# Altium PCB bwl1.1.PcbDoc
Units mil, origin at the board's own origin, x right, y up, seen from the top; angles counter-clockwise.
Board outline 1985.03 x 3944.03 mil, 2 copper layers (Top Layer, Bottom Layer); 111 components, 72 nets, 399 pads, 68 vias.
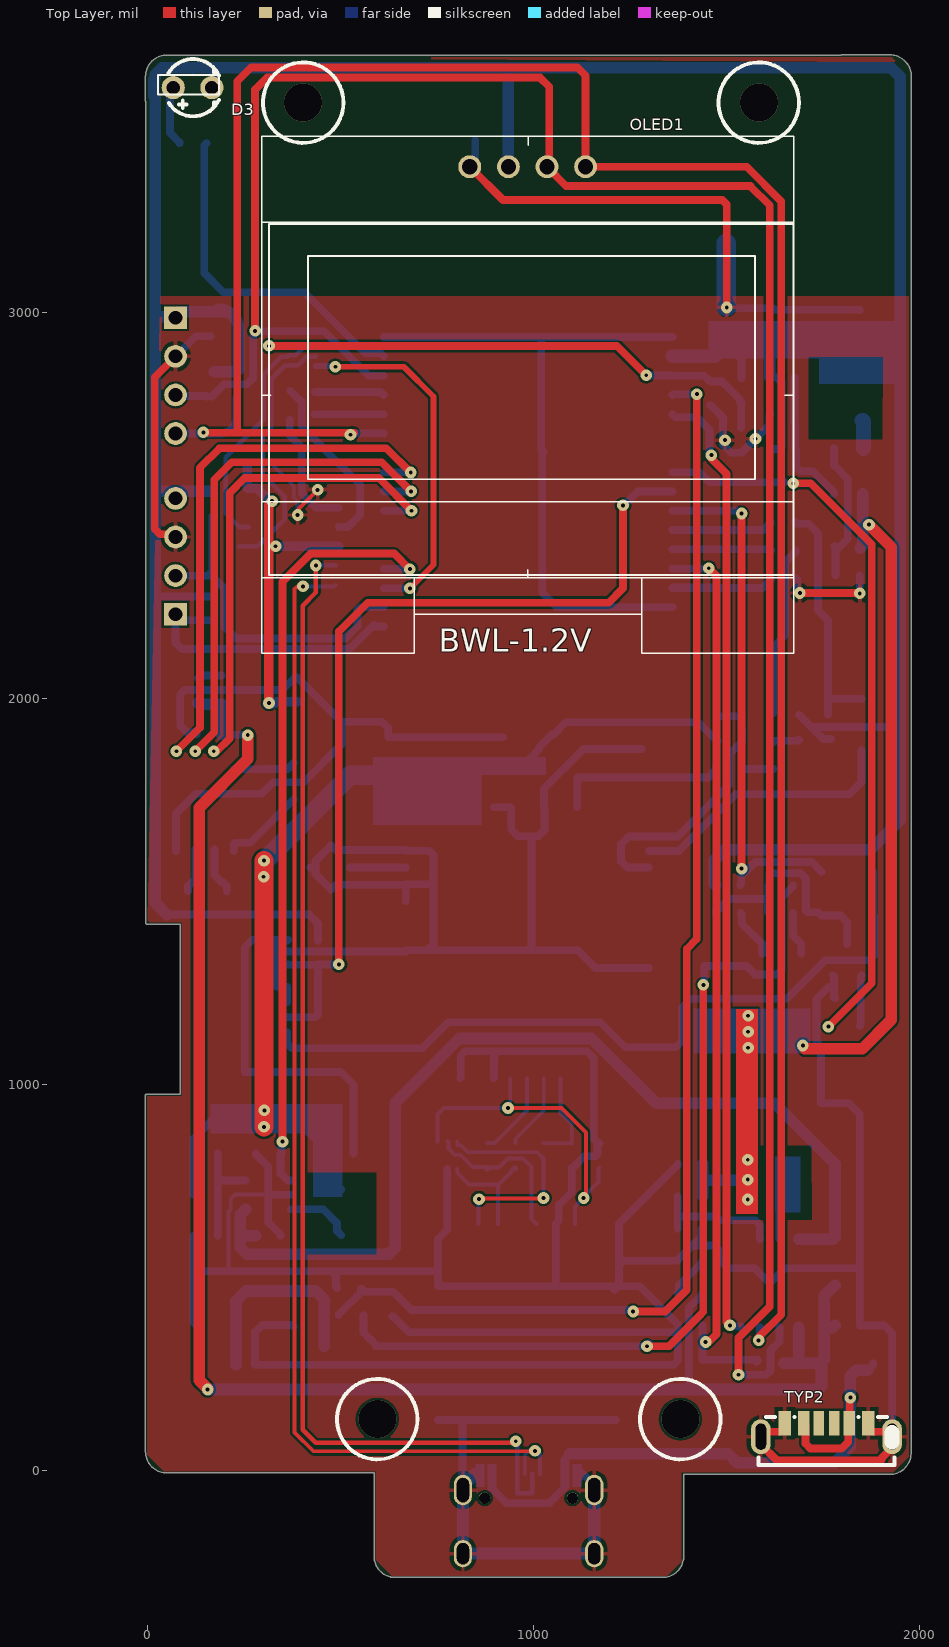
[diagram p0: Top Layer view]
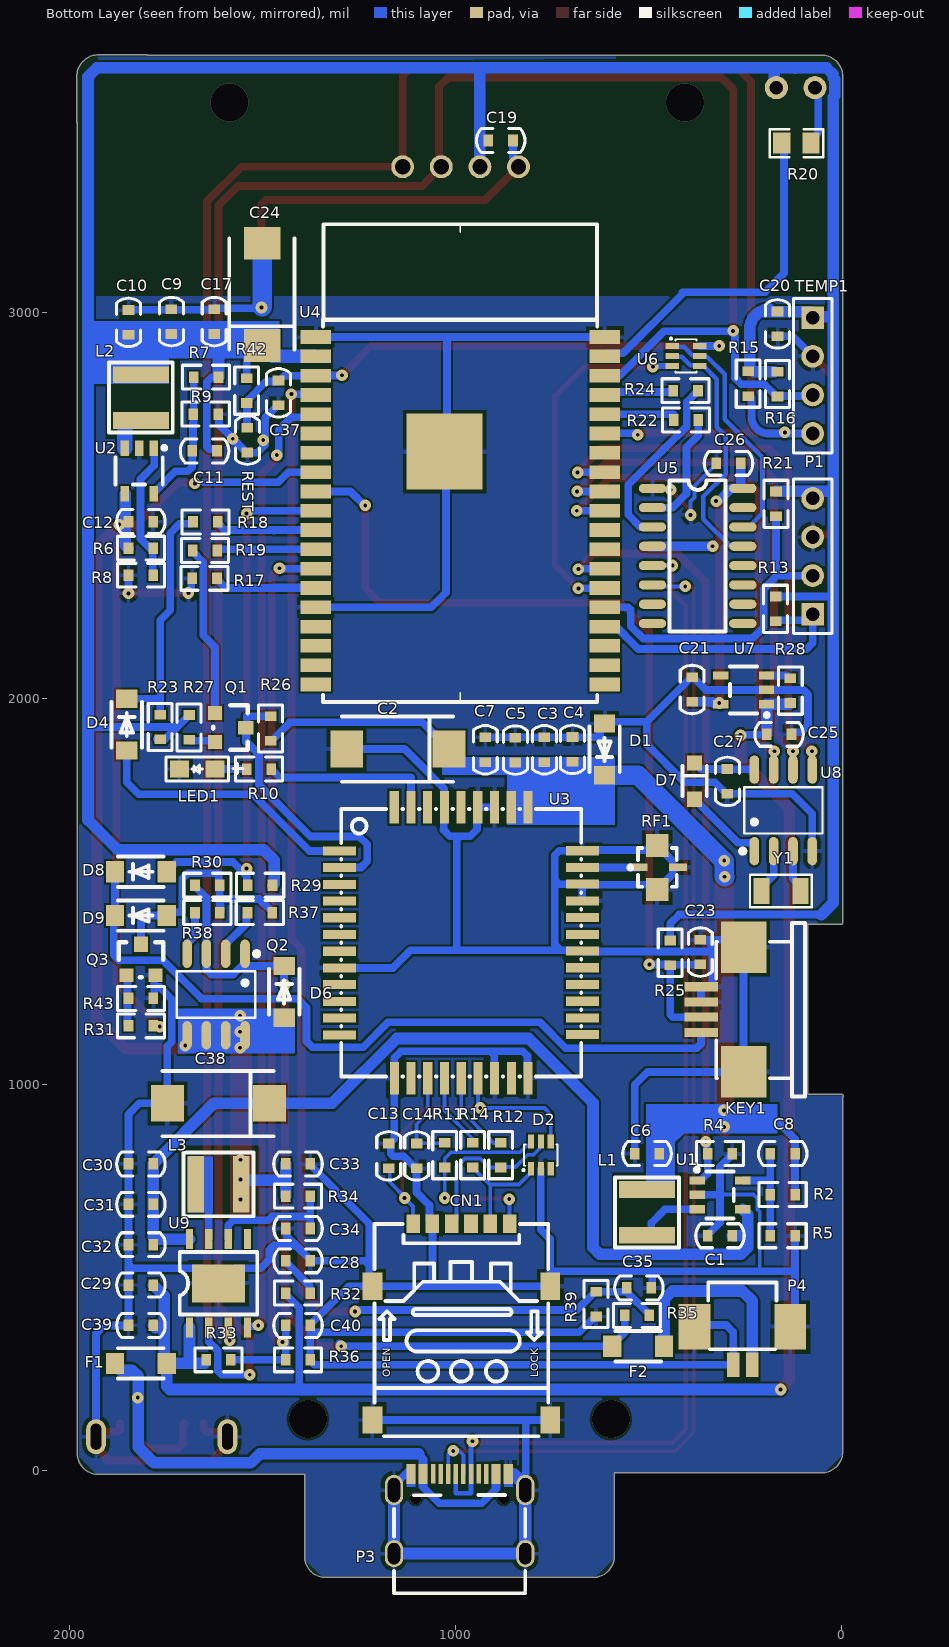
[diagram p1: Bottom Layer view, seen from below]

## Layer stack, top to bottom
Top Solder: solder mask 0.4, Solder Resist, Dk 3.5
Top Layer: signal copper 1.4
Dielectric 1: dielectric 12.6, FR-4, Dk 4.8
Bottom Layer: signal copper 1.4
Bottom Solder: solder mask 0.4, Solder Resist, Dk 3.5

## Board outline
51,-5.01 171,-5.01 ccw(c171,0) 171.69,-4.97 588.55,-4.97 588.55,-218.68 ccw(c593,-221) 587.98,-221 ccw(c643,-221) 588.55,-228.88 588.55,-230.57 ccw(c593.57,-230.57) 589.39,-233.34 ccw(c643,-221) 630.48,-274.57 ccw(c633.94,-270.94) 633.94,-275.95 640.37,-275.95 ccw(c643,-221) 643,-276.01 ccw(c643,-271) 643.79,-275.95 1334.21,-275.95 ccw(c1335,-271) 1335,-276.02 ccw(c1335,-221) 1337.63,-275.95 1342.06,-275.95 ccw(c1342.06,-270.94) 1344.81,-275.13 ccw(c1335,-221) 1389.14,-230.78 ccw(c1384.91,-228.09) 1389.92,-228.09 1389.92,-224.22 ccw(c1335,-221) 1390.01,-221 ccw(c1385,-221) 1389.92,-220.03 1389.92,-8.94 1923.11,-8.94 ccw(c1924,-4) 1924,-9.02 ccw(c1924,46) 1978.99,44.29 ccw(c1974.47,46.47) 1979.49,46.47 1979.49,3492.76 ccw(c1975,3495) 1980.01,3495 1980.01,3612 ccw(c1925,3612) 1963.4,3651.4 ccw(c1924,3613) 1924,3668.02 1800,3668.02 ccw(c1800,3663) 1797.17,3667.14 66.13,3667.14 ccw(c66.13,3662.13) 65.01,3667.02 51,3667.02 ccw(c51,3612) -4.01,3612 -4.01,3549 ccw(c1,3549) -3.62,3547.05 -3.62,1420.39 ccw(c1.39,1420.39) 1.39,1415.38 86.45,1415.38 86.45,975.61 1.98,975.61 ccw(c0,971) -3.95,967.91 -3.95,119.79 ccw(c1,119) -4.01,119 -4.01,50 ccw(c51,50)

## Design rules (kind name [scope] priority, off if disabled: settings)
Clearance [All] p1: gap=6 ignorepadtopadclearanceinfootprint=FALSE
MinimumSolderMaskSliver [All] p1 off: minsoldermaskwidth=2
PolygonConnect [All] p1: connectstyle=Relief reliefconductorwidth=10 reliefentries=4 polygonreliefangle="90 Angle" airgapwidth=10
RoutingVias [All] p1: holewidth=28 width=50 viastyle="Through Hole" minholewidth=28 minwidth=50 maxholewidth=28 maxwidth=50
SilkToSilkClearance [All] p1 off: silktosilkclearance=10
SilkToSolderMaskClearance [IsPad] p1 off: minsilkscreentomaskgap=10 clearancetoexposedcopper=TRUE
SolderMaskExpansion [All] p1: expansion=4
Width [All] p1: maxlimit=100 minlimit=10 preferedwidth=10
27 further rules are at their usual default settings.

## Components (designator, comment, footprint, x,y, rotation, side; value= is the part's Value field where it differs from the comment)
C1 "22uf/6.3V" CAP-SMD-0603 281.99,609.16 r0 bottom value=22UF
C2 "477" D7343电容 1016,1870 r0 bottom
C3 "10uf" CAP-SMD-0603 769,1900 r270 bottom
C4 "33p" CAP-SMD-0603 696,1901 r270 bottom
C5 "10pf" CAP-SMD-0603 844,1899 r270 bottom
C6 "22uf/6.3V" CAP-SMD-0603 535,822 r180 bottom value=22UF/6.3V
C7 "22uf/6.3V" CAP-SMD-0603 922,1900 r270 bottom value=22UF/6.3V
C8 "47pf" CAP-SMD-0603 183.54,822 r180 bottom
C9 "104" CAP-SMD-0603 1735,3009 r270 bottom
C10 "22uf/6.3V" CAP-SMD-0603 1846,3007 r270 bottom value=22UF/6.3V
C11 "47pf" CAP-SMD-0603 1681,2642 r180 bottom
C12 "22uf/6.3V" CAP-SMD-0603 1846,2459 r180 bottom value=22UF
C13 "100nf" CAP-SMD-0603 1172,848 r270 bottom
C14 "22P" CAP-SMD-0603 1099.5,784 r90 bottom
C17 "104" CAP-SMD-0603 1624,2945 r90 bottom
C19 "100nf" CAP-SMD-0603 850,3446 r0 bottom
C20 "100nf" CAP-SMD-0603 165,2939 r90 bottom
C21 "10uf" CAP-SMD-0603 386,2056 r270 bottom
C23 "100nf" CAP-SMD-0603 365,1376 r270 bottom
C24 "477" D7343电容 1500,2915 r90 bottom
C25 "100nf" CAP-SMD-0603 193,1908 r180 bottom
C26 "100nf" CAP-SMD-0603 260,2610 r0 bottom
C27 "1uf" CAP-SMD-0603 295,1818 r270 bottom
C28 "10uf" CAP-SMD-0603 1439,544.22 r180 bottom
C29 "10uf" CAP-SMD-0603 1782,481.48 r0 bottom
C30 "22uf" CAP-SMD-0603 1782,795.18 r0 bottom
C31 "10uf" CAP-SMD-0603 1782,690.61 r0 bottom
C32 "104" CAP-SMD-0603 1782,586.04 r0 bottom
C33 "10uf" CAP-SMD-0603 1375,795.18 r0 bottom
C34 "10uf" CAP-SMD-0603 1439,627.87 r180 bottom
C35 "100nf" CAP-SMD-0603 492,474 r0 bottom
C37 "1UF" CAP-SMD-0603 1457.5,2760.5 r90 bottom
C38 "477" D7343电容 1480.5,952 r0 bottom
C39 "10uf" CAP-SMD-0603 1846,376.91 r180 bottom
C40 "100nf" CAP-SMD-0603 1439,376.91 r180 bottom
CN1 "NANO SIM 6PIN" "SIM-SMD_C77877 - DUPLICATE" 984,386 r90 bottom
D1 "5.1V 500MW" SOD-123(4148) 613,1868.93 r90 bottom
D2 "SMF05CT1G" SOT-363_L2.0-W1.3-P0.65-LS2.1-TL 778,818 r90 bottom
D3 "LED0" LED-TH_BD3.8-P2.54-RD 118,3583 r180 top
D4 "Diode 1N4148" SOD-123(4148) 1850.63,1933 r270 bottom
D6 "1N5817W" SOD-123(4148) 1443,1241 r270 bottom
D7 "1N4148" SOD323(IN4148) 380,1834 r270 bottom
D8 "1N5817W" SOD-123(4148) 1814,1551.97 r180 bottom
D9 "1N5817W" SOD-123(4148) 1814,1438.57 r180 bottom
F1 "2A FUSE" SOD-123 1814,278.5 r180 bottom
F2 "2A FUSE" SOD-123 526,323 r180 bottom
KEY1 "Header 6" FPC-SMD_4P-P1.00_AFA07-S04ECC-00 308,1195 r90 bottom locked
L1 "2.2uH dcr<0.1R-2A 4*4" IND-SMD_L4*4 503,669.71 r90 bottom value=2.2uH
L2 "2.2uH dcr<0.1R-2A 4*4" IND-SMD_L4*4 1814,2780 r90 bottom value=2.2uH
L3 "1uH   4*4" IND-SMD_L4*4 1613,742.5 r180 bottom value=1uH
LED1 "LED0" LED 1668,1818 r180 bottom
OLED1 "1.3寸" OLED-2.1 836,3378 r0 top locked
P1 "Header 4P" HDR1X4 74,2219 r90 bottom
P3 "TYPE-C-31-M-12" USB-C_SMD-TYPE-C-31-M-12 988.38,-110.92 r180 bottom locked
P4 "电池" CONN-SMD_2P-P1.25_X9821WRS-02-9TSN 256,324 r0 bottom
Q1 "AO3402" SOT-23-BAT54C 1622,1963 r270 bottom
Q2 "IRF7304QTR" SOP-8_L4.9-W3.9-P1.27-LS6.0-BL 1619.3,1234 r0 bottom
Q3 "SEBT8050" SOT-23-BAT54C 1851.5,1284 r180 bottom
R2 "560k" RES-SMD-0603 151.54,715.58 r0 bottom
R4 "100K/NC" RES-SMD-0603 313.99,822 r180 bottom
R5 "100K/NC" RES-SMD-0603 151.54,609.16 r180 bottom value=100K_1%
R6 "100K/NC" RES-SMD-0603 1814,2390 r180 bottom
R7 "680k" RES-SMD-0603 1645,2833 r0 bottom value=680K
R8 "100K/NC" RES-SMD-0603 1814,2320 r0 bottom
R9 "150K" RES-SMD-0603 1646,2737.5 r180 bottom value=150k
R10 "1k" RES-SMD-0603 1508,1818 r0 bottom
R11 "22R" RES-SMD-0603 1027,817.84 r90 bottom
R12 "22R" RES-SMD-0603 882,817.84 r270 bottom
R13 "4.7k" RES-SMD-0603 170,2233 r90 bottom
R14 "22R" RES-SMD-0603 954.5,817.84 r270 bottom
R15 "4.7K" RES-SMD-0603 241,2816 r90 bottom
R16 "4.7K" RES-SMD-0603 165,2815 r90 bottom
R17 "12K" RES-SMD-0603 1649,2312 r180 bottom
R18 "0R" RES-SMD-0603 1647,2458 r0 bottom
R19 "0R" RES-SMD-0603 1648,2384 r0 bottom
R20 "660" R0805 116,3439 r180 bottom
R21 "4.7k" RES-SMD-0603 169,2505 r90 bottom
R22 "0R" RES-SMD-0603 402,2722 r180 bottom value=120R
R23 "470" RES-SMD-0603 1764,1927 r90 bottom
R24 "0" RES-SMD-0603 403,2798 r180 bottom value=120R
R25 "51K" RES-SMD-0603 443,1342 r90 bottom
R26 "470" RES-SMD-0603 1478,1923 r270 bottom
R27 "470" RES-SMD-0603 1689,1926 r90 bottom
R28 "10k" RES-SMD-0603 132,2021 r90 bottom
R29 "10k" RES-SMD-0603 1505,1517 r180 bottom
R30 "10k" RES-SMD-0603 1642,1517 r180 bottom
R31 "1k" RES-SMD-0603 1814,1153 r180 bottom
R32 "2R" RES-SMD-0603 1407,460.56 r0 bottom value=2
R33 "4.7k" RES-SMD-0603 1613,287.87 r180 bottom
R34 "2R" RES-SMD-0603 1407,711.52 r0 bottom
R35 "100k" RES-SMD-0603 529,403 r180 bottom
R36 "4.7k" RES-SMD-0603 1407,287.87 r0 bottom
R37 "5.1K" RES-SMD-0603 1506,1446 r180 bottom value=5.1k
R38 "5.1K" RES-SMD-0603 1642,1446 r180 bottom value=5.1k
R39 "100k" RES-SMD-0603 635,432 r270 bottom
R42 "12K" RES-SMD-0603 1540,2798 r270 bottom
R43 "10k" RES-SMD-0603 1814,1224 r0 bottom
REST "Header 2" CAP-SMD-0603 1538,2702 r270 bottom
RF1 "BWIPX-3-001E" IPEX-SMD_BWIPX-3-001E 474,1563 r270 bottom
TEMP1 "Header 4P" HDR1X4 74,2987 r270 bottom
TYP2 "type-c-s" TYPE-C-SMD_TYPE-C-31-D-05 1760,106 r180 top
U1 "SY8089AAAC" SOT-23-5-2 314,715 r0 bottom
U2 "SY8089AAAC" SOT-23-5-2 1818.49,2590 r90 bottom
U3 "SIM800C 24Mbit" COMM-SMD_42P-L15.7-W17.6-P1.10 985,1368 r180 bottom
U4 "ESP32-WROVER-E(16MB)" WIFIM-SMD_39P-L31.4-W18.0-P1.27 986.96,2486.97 r180 bottom locked
U5 "CH340C" SOIC-16_L9.9-W3.9-P1.27-LS6.0-TL 372,2370 r180 bottom
U6 "UMH3N" SOT-363_L2.0-W1.3-P0.65-LS2.1-TL 402,2888 r180 bottom
U7 "ME6211c33m5g-n" SOT-23-5-2 253,2023 r180 bottom
U8 "DS1302Z+" SOP-8_L4.9-W3.9-P1.27-LS6.0-BL 150,1711 r180 bottom
U9 "IP5306-I2C" ESOP-8 1613,486 r180 bottom
Y1 "32.768K" OSC-SMD_L3.2-W1.5 156.3,1502.11 r180 bottom

## Footprints (in the part's own frame and the unit in brackets; to place one, negate y for a bottom-side part, rotate by r counter-clockwise, add the part's x,y. Pads: shape width x height; smd on the part's side, far side on the other; paste and mask are expansions set on the pad)
CAP-SMD-0603 [mil]
  rect 25x30 smd: 1(0,0) 2(64,0)
  silkscreen extent -31,-31 95,31, body extent 0,-15 63,16, height 18
COMM-SMD_42P-L15.7-W17.6-P1.10 [mil]
  rect 85x23.6 smd: 1(-314.5,238) 2(-314.5,194.7) 3(-314.5,151.4) 4(-314.5,108.1) 5(-314.5,64.8) 6(-314.5,21.5) 7(-314.5,-21.8) 8(-314.5,-65.1) 9(-314.5,-108.5) 10(-314.5,-151.8) 11(-314.5,-195.1) 12(-314.5,-238.4) 22(314.5,-238) 23(314.5,-194.7) 24(314.5,-151.4) 25(314.5,-108.1) 26(314.5,-64.8) 27(314.5,-21.4) 28(314.5,21.9) 29(314.5,65.2) 30(314.5,108.5) 31(314.5,151.8) 32(314.5,195.1) 33(314.5,238.4)
  rect 23.6x85 smd: 13(-172.5,-351) 14(-129.2,-351) 15(-85.9,-351) 16(-42.6,-351) 17(0.7,-351) 18(44,-351) 19(87.3,-351) 20(130.6,-351) 21(173.9,-351) 34(173.5,351) 35(130.2,351) 36(86.9,351) 37(43.6,351) 38(0.3,351) 39(-43,351) 40(-86.3,351) 41(-129.6,351) 42(-172.9,351)
  silkscreen extent -310,-346 312,347
CONN-SMD_2P-P1.25_X9821WRS-02-9TSN [mm]
  rect 0.8x1.6 smd: 1(-0.65,1.25) 2(0.6,1.25)
  rect 2.1x3 smd: 3(3.15,-1.25) 4(-3.15,-1.25)
  silkscreen extent -2.25,-4.18 2.25,0.22, body extent -3.55,-4.23 3.65,0.28, height 4
D7343电容 [mm]
  rect 2.16x2.41 smd: 1(0,0) 2(6.731,0)
  silkscreen extent -0.25,-2.14 7.05,2.16
ESOP-8 [mil]
  rect 18.9x51.18 smd: 1(-75,-114.5) 2(-25,-114.5) 3(25,-114.5) 4(75,-114.5) 5(75,114.5) 6(25,114.5) 7(-25,114.5) 8(-75,114.5)
  rect 137.8x98.42 smd: 9(0,0)
  silkscreen extent -100,-81 100,81, body extent -100,-83 100,79, height 79
FPC-SMD_4P-P1.00_AFA07-S04ECC-00 [mm]
  rect 0.6x2.2 smd: 1(-1.5,1.4) 2(-0.5,1.4) 3(0.499,1.4) 4(1.499,1.4)
  rect 3.4x3 smd: 5(4.1,-1.4) 6(-4.1,-1.4)
  silkscreen extent -5.72,-5.43 5.69,0.4, body extent -5.72,-5.5 5.75,0.43, height 2.5
HDR1X4 [mm] "Connector; Header; 4 Position"
  rect 1.5x1.5 hole 0.9: 1(0,0)
  round 1.5 hole 0.9: 2(2.54,0) 3(5.08,0) 4(7.62,0)
  silkscreen extent -1.27,-1.27 8.89,1.27
IND-SMD_L4*4 [mm]
  rect 1.1x3.7 smd: 1(-1.5,0) 2(1.5,0)
  silkscreen extent -2.3,-2.1 2.3,2.1, body extent -2.16,-2.03 2.16,2.03, height 2
IPEX-SMD_BWIPX-3-001E [mm]
  rect 0.5x1.2 smd: 1(-0.005,-1.3) 4(-0.005,1.3)
  rect 1.5x1.5 smd: 2(1.455,-0.07) 3(-1.455,-0.07)
  silkscreen extent -1.27,-1.96 1.27,1.22, body extent -1.31,-1.31 1.3,1.19, height 2
LED [mil]
  rect 49x43 smd: 1(46.26,0) 2(-46.26,0)
  silkscreen extent -81,-31 118,31, body extent -46,-22 47,22, height 39
LED-TH_BD3.8-P2.54-RD [mil]
  round 60 hole 35.43: 1(-50,0) 2(50,0)
  silkscreen extent -68,-74 63,74
OLED-2.1 [mm]
  round 1.5 hole 1: 1(0,0) 2(2.54,0) 3(5.08,0) 4(7.62,0)
  silkscreen extent -13.68,-32 21.32,2, body extent -13.69,-31.99 21.36,2.05, height 2.7
OSC-SMD_L3.2-W1.5 [mm]
  rect 1.05x1.7 smd: 1(-1.275,0) 2(1.275,0)
  silkscreen extent -2.03,-1.08 2.03,1.08
R0805 [mil]
  rect 44.59x54.21 smd: 1(-38.04,0) 2(38.04,0)
  silkscreen extent -69,-36 69,36
RES-SMD-0603 [mil]
  rect 25x30 smd: 1(-32,0) 2(32,0)
  silkscreen extent -61,-31 61,31, body extent -50,-20 52,19, height 21
"SIM-SMD_C77877 - DUPLICATE" [mm]
  rect 1.8x1.3 smd: 0(-6.451,-5.853) 0(-6.451,5.853) 0(2.349,-5.853) 0(2.349,5.853)
  rect 1.2x0.9 smd: C1(6.451,3.173) C2(6.451,0.633) C3(6.451,-1.907) C5(6.451,1.903) C6(6.451,-0.637) C7(6.451,-3.177)
  silkscreen extent -7.52,-5.71 6.45,5.71, body extent -7.52,-5.75 6.45,5.75, height 1
SOD323(IN4148) [mm]
  rect 1x1 smd: 1(0,0) 2(2.4,0)
  silkscreen extent 0.2,-0.8 2.2,0.8, body extent -0.06,-0.76 2.35,0.76, height 1
SOD-123 [mm]
  rect 1.2x1.4 smd: 1(-1.7,0) 2(1.7,0)
  silkscreen extent -1.5,-1 1.5,1, body extent -1.68,-1 1.73,1.02, height 1.5
SOD-123(4148) [mm]
  rect 1.2x1.4 smd: 1(-1.7,0) 2(1.7,0)
  silkscreen extent -1.5,-1 1.5,1, body extent -1.68,-1 1.73,1.02, height 1.5
SOIC-16_L9.9-W3.9-P1.27-LS6.0-TL [mm]
  oval 1.8x0.6 smd: 1(-2.972,4.445) 2(-2.972,3.175) 3(-2.972,1.905) 4(-2.972,0.635) 5(-2.972,-0.635) 6(-2.972,-1.905) 7(-2.972,-3.175) 8(-2.972,-4.445) 9(2.972,-4.445) 10(2.972,-3.175) 11(2.972,-1.905) 12(2.972,-0.635) 13(2.972,0.635) 14(2.972,1.905) 15(2.972,3.175) 16(2.972,4.445)
  silkscreen extent -1.85,-4.98 1.83,4.98
SOP-8_L4.9-W3.9-P1.27-LS6.0-BL [mm]
  oval 0.63x1.865 smd: 1(-1.905,-2.682) 2(-0.635,-2.682) 3(0.635,-2.682) 4(1.905,-2.682) 5(1.905,2.682) 6(0.635,2.682) 7(-0.635,2.682) 8(-1.905,2.682)
  silkscreen extent -2.82,-2.83 2.58,1.52
SOT-23-5-2 [mm]
  rect 1x0.55 smd: 1(1.5,-0.95) 2(1.5,0) 3(1.5,0.95) 4(-1.5,0.95) 5(-1.5,-0.95)
  silkscreen extent -0.9,-1.78 1.65,1.55, body extent -1.46,-1.6 1.59,1.58, height 1
SOT-23-BAT54C [mil]
  rect 36x36 smd: 1(0,0) 2(75,0)
  rect 36x40 smd: 3(38,80)
  silkscreen extent -20,-5 95,85, body extent -20,3 95,71, height 39
SOT-363_L2.0-W1.3-P0.65-LS2.1-TL [mm]
  rect 0.9x0.4 smd: 1(-0.9,0.65) 2(-0.9,0) 3(-0.9,-0.65) 4(0.9,-0.65) 5(0.9,0) 6(0.9,0.65)
  silkscreen extent -1.06,-1.1 0.7,1.21, body extent -0.9,-1.12 0.95,1.13, height 1
TYPE-C-SMD_TYPE-C-31-D-05 [mm]
  oval 1.3x2.3 hole 0.7 slot 1.7 at 90 deg: 7(4.32,0.44) 8(-4.32,0.44)
  rect 0.7x1.6 smd: A5(-0.5,-0.44) B5(0.5,-0.44)
  rect 0.76x1.6 smd: A9(1.502,-0.44) B9(-1.502,-0.44)
  rect 0.8x1.6 smd: A12(2.75,-0.44) B12(-2.75,-0.44)
  silkscreen extent -4.47,-0.87 4.47,2.31
USB-C_SMD-TYPE-C-31-M-12 [mm]
  oval 1.2x1.8 hole 0.8 slot 1.4 at 90 deg: 0(-4.32,-2.624) 0(4.32,-2.624)
  oval 1.2x2 hole 0.8 slot 1.6 at 90 deg: 0(-4.32,1.556) 0(4.32,1.556)
  rect 0.3x1.3 smd: A1(-3.35,2.623) A4(-2.55,2.623) A5(-1.25,2.623) A6(-0.25,2.623) A7(0.25,2.623) A8(1.25,2.624) A9(2.55,2.623) A12(3.35,2.623) B1(3.05,2.623) B4(2.25,2.623) B5(1.75,2.623) B6(0.75,2.623) B7(-0.75,2.623) B8(-1.75,2.624) B9(-2.25,2.623) B12(-3.05,2.623)
  round 0.75 hole 0.75 unplated: ""(-2.89,1.026) ""(2.89,1.026)
  silkscreen extent -4.32,-5.23 4.32,1.22
WIFIM-SMD_39P-L31.4-W18.0-P1.27 [mm]
  rect 2x0.9 smd: 1(-9.5,11.43) 2(-9.5,10.16) 3(-9.5,8.89) 4(-9.5,7.62) 5(-9.5,6.35) 6(-9.5,5.08) 7(-9.5,3.81) 8(-9.5,2.54) 9(-9.5,1.27) 10(-9.5,0) 11(-9.5,-1.27) 12(-9.5,-2.54) 13(-9.5,-3.81) 14(-9.5,-5.08) 15(-9.5,-6.35) 16(-9.5,-7.62) 17(-9.5,-8.89) 18(-9.5,-10.16) 19(-9.5,-11.43) 20(9.5,-11.43) 21(9.5,-10.16) 22(9.5,-8.89) 23(9.5,-7.62) 24(9.5,-6.35) 25(9.5,-5.08) 26(9.5,-3.81) 27(9.5,-2.54) 28(9.5,-1.27) 29(9.5,0) 30(9.5,1.27) 31(9.5,2.54) 32(9.5,3.81) 33(9.5,5.08) 34(9.5,6.35) 35(9.5,7.62) 36(9.5,8.89) 37(9.5,10.16) 38(9.5,11.43)
  rect 5x5 smd: 39(-1.017,3.887)
  silkscreen extent -9.02,-12.6 9.02,18.87, body extent -9.02,-12.57 8.99,18.85, height 2.5

## Part data
C1 C3 C4 C5 C6 C7 C8 C9 C10 C11 C12 C13 C14 C17 C19 C20 C21 C23 C25 C26 C27 C28 C29 C30 C31 C32 C33 C34 C35 C37 C39 C40: library part Cap, "贴片电容", LatestRevisionDate=17-Jul-2002, LatestRevisionNote="Re-released for DXP Platform.", PackageReference=RAD-0.3, Published=8-Jun-2000, Publisher="Altium Limited"
C2: library part "Cap Pol1", "大容量贴片钽电容", LatestRevisionDate=17-Jul-2002, LatestRevisionNote="Re-released for DXP Platform.", PackageReference=RB7.6-15, Published=8-Jun-2000, Publisher="Altium Limited"
C24 C38: library part "Cap Pol1", "贴片电解电容", LatestRevisionDate=17-Jul-2002, LatestRevisionNote="Re-released for DXP Platform.", PackageReference=RB7.6-15, Published=8-Jun-2000, Publisher="Altium Limited"
CN1: library part nano1.4_c77877, "SIM 卡座", BOM_Manufacturer="Boom Precision Elec", BOM_Manufacturer Part=-, BOM_Supplier=LCSC, BOM_Supplier Part=C77877, spicePre=C, spiceSymbolName=nano1.4_c77877
D1: library part "Diode 1N4148", "贴片稳压二极管", Code_JEDEC=DO-204-AH, ComponentLink1Description="Manufacturer Link", ComponentLink1URL=http://www.fairchildsemi.com/, ComponentLink2Description=Datasheet, ComponentLink2URL=http://www.fairchildsemi.com/ds/1N%2F1N4148.pdf, DatasheetDocument=1997, LatestRevisionDate=17-Jul-2002, LatestRevisionNote="Re-released for DXP Platform.", PackageReference=DO-35, Published=8-Jun-2000, Publisher="Altium Limited"
D2: library part SMF05C_C558425, "集成电路", BOM_Manufacturer="TECH PUBLIC", BOM_Manufacturer Part=SMF05C, BOM_Supplier=LCSC, BOM_Supplier Part=C558425, Contributor=LCSC, spicePre=D, spiceSymbolName=SMF05C_C558425
D3 LED1: "贴片发光二极管", LatestRevisionDate=08-Jul-2005, LatestRevisionNote="Mech Layer 1 removed.", PackageReference=LED-0, Published=8-Jun-2000, Publisher="Altium Limited"
D4: "贴片二极管", Code_JEDEC=DO-204-AH, ComponentLink1Description="Manufacturer Link", ComponentLink1URL=http://www.fairchildsemi.com/, ComponentLink2Description=Datasheet, ComponentLink2URL=http://www.fairchildsemi.com/ds/1N%2F1N4148.pdf, DatasheetDocument=1997, LatestRevisionDate=17-Jul-2002, LatestRevisionNote="Re-released for DXP Platform.", PackageReference=DO-35, Published=8-Jun-2000, Publisher="Altium Limited"
D6 D8 D9: BOM_JLCPCB Part Class="Extended Part", BOM_Manufacturer=TWGMC, BOM_Manufacturer Part=1N5817W, BOM_Supplier=LCSC, BOM_Supplier Part=C727113, Contributor=LCSC, spicePre=D, spiceSymbolName=1N5817W
D7: library part "Diode 1N4148", "IN4148", Code_JEDEC=DO-204-AH, ComponentLink1Description="Manufacturer Link", ComponentLink1URL=http://www.fairchildsemi.com/, ComponentLink2Description=Datasheet, ComponentLink2URL=http://www.fairchildsemi.com/ds/1N%2F1N4148.pdf, DatasheetDocument=1997, LatestRevisionDate=17-Jul-2002, LatestRevisionNote="Re-released for DXP Platform.", PackageReference=DO-35, Published=8-Jun-2000, Publisher="Altium Limited"
F1 F2: library part "Fuse 2", "Fuse", LatestRevisionDate=17-Jul-2002, LatestRevisionNote="Re-released for DXP Platform.", PackageReference=PIN-W2/E2.8, Published=8-Jun-2000, Publisher="Altium Limited"
KEY1: "Header, 6-Pin", LatestRevisionDate=17-Jul-2002, LatestRevisionNote="Re-released for DXP Platform.", Publisher="Altium Limited"
L1 L2 L3: library part "Inductor Iron", "贴片电感器", LatestRevisionDate=17-Jul-2002, LatestRevisionNote="Re-released for DXP Platform.", PackageReference=AXIAL-0.9, Published=24-Mar-1999, Publisher="Altium Limited"
OLED1: library part "Header 4", "OLED模块", LatestRevisionDate=17-Jul-2002, LatestRevisionNote="Re-released for DXP Platform.", Publisher="Altium Limited"
P1 TEMP1: library part "Header 4", "空", LatestRevisionDate=17-Jul-2002, LatestRevisionNote="Re-released for DXP Platform.", Publisher="Altium Limited"
P3: "16 PIN Type-c", BOM_Manufacturer="Rectangular Connectors - Contacts", BOM_Manufacturer Part=TYPE-C-31-M-12, BOM_Paste Type=expand, BOM_Supplier=LCSC, BOM_Supplier Part=C165948, Contributor=LCSC, spicePre=U, spiceSymbolName=TYPE-C-31-M-12
P4: library part "Header 4", "Header, 4-Pin", LatestRevisionDate=17-Jul-2002, LatestRevisionNote="Re-released for DXP Platform.", Publisher="Altium Limited"
Q1: library part 2N3904, "NPN 贴片三极管", PackageDocument=Sep-1998, Code_JEDEC=TO-92A, ComponentLink1Description="Manufacturer Link", ComponentLink1URL=http://www.fairchildsemi.com/, ComponentLink2Description=Datasheet, ComponentLink2URL=http://www.fairchildsemi.com/ds/2N%2F2N3904.pdf, DatasheetDocument=1997, LatestRevisionDate=15-Jan-2003, LatestRevisionNote="PCB Footprint 'BCY-W3/D4.7' replaced", PackageReference=TO-92A, Published=8-Jun-2000, Publisher="Altium Limited"
Q2: BOM_JLCPCB Part Class="Extended Part", BOM_Manufacturer="VBsemi Elec", BOM_Manufacturer Part=IRF7304QTR, BOM_Supplier=LCSC, BOM_Supplier Part=C879032, Contributor=LCSC, spicePre=Q, spiceSymbolName=IRF7304QTR
Q3: BOM_JLCPCB Part Class="Extended Part", BOM_Manufacturer=SINO-IC, BOM_Manufacturer Part=SEBT8050, BOM_Supplier=LCSC, BOM_Supplier Part=C393132, Contributor=LCSC, spicePre=Q, spiceSymbolName=SEBT8050
R2 R4 R5 R6 R7 R8 R9 R10 R11 R12 R13 R14 R15 R16 R17 R18 R19 R20 R21 R22 R23 R24 R25 R26 R27 R28 R29 R30 R31 R32 R33 R34 R35 R36 R37 R38 R39 R42 R43: library part Res2, "贴片电阻", LatestRevisionDate=17-Jul-2002, LatestRevisionNote="Re-released for DXP Platform.", PackageReference=AXIAL-0.4, Published=8-Jun-2000, Publisher="Altium Limited"
REST: "空", LatestRevisionDate=17-Jul-2002, LatestRevisionNote="Re-released for DXP Platform.", Publisher="Altium Limited"
RF1: BOM_Manufacturer="BAT WIRELESS", BOM_Manufacturer Part=BWIPX-3-001E, BOM_Supplier=LCSC, BOM_Supplier Part=C784400, Contributor=LCSC, spicePre=R, spiceSymbolName=BWIPX-3-001E
TYP2: library part "Header 8", "TYPE-C 立式", LatestRevisionDate=17-Jul-2002, LatestRevisionNote="Re-released for DXP Platform.", Publisher="Altium Limited"
U1 U2: library part SY8089, "DC-DCоƬ"
U3: library part SIM800C32, BOM_Manufacturer=SIMCOM, BOM_Manufacturer Part=SIM800C32, BOM_Supplier=LCSC, BOM_Supplier Part=C69120, spicePre=U, spiceSymbolName=SIM800C32
U4: library part ESP32-WROVER-E(16MB)_1, "集成电路", BOM_Manufacturer="Espressif Systems", BOM_Manufacturer Part=ESP32-WROVER-E(16MB), BOM_Supplier=LCSC, BOM_Supplier Part=C529589, Contributor=LCSC, spicePre=U, spiceSymbolName=ESP32-WROVER-E(16MB)
U5: BOM_Manufacturer=WCH, BOM_Manufacturer Part=CH340C, BOM_Paste Type=recommend, BOM_Supplier=LCSC, BOM_Supplier Part=C84681, spicePre=U, spiceSymbolName=CH340C
U6: library part UMH3N_1, "双数字晶体管", BOM_LCSC Assembly=Yes, BOM_Manufacturer=CJ, BOM_Manufacturer Part=UMH3N, BOM_Supplier=LCSC, BOM_Supplier Part=C62892, image=//image.lceda.cn/szlcsc/C62892.jpg, SMT Type=Extend, spicePre=Q, spiceSymbolName=UMH3N
U7: library part ME6211, "LDO_低压差线性稳压"
U8: library part DS1302, "时钟芯片"
U9: "集成电路"
Y1: library part XTAL, "晶振", LatestRevisionDate=17-Jul-2002, LatestRevisionNote="Re-released for DXP Platform.", PackageReference=R38, Published=8-Jun-2000, Publisher="Altium Limited"

## Via types
v1: diameter 30, hole 10, Top Layer to Bottom Layer, 64 vias
v2: diameter 98.43, hole 98.43, Top Layer to Bottom Layer, 4 vias

## Nets (pads, with @x,y where several pads share a name; then routed paths per layer and width w, separated by ;. In a path a pad name is that pad's centre, name@x,y a point inside that pad or via, vN(x,y) a via of type N, cw(c..) or ccw(c..) an arc to the next point about the centre after c; other vN are vias at no path point)
5V: C25.1 C29.1 C39.2 F1.2 R28.1 R32.2 R33.1 U7.1 U9.1 | length 4300
  Top Layer w20: v1(157,211) v1@157,213
  Top Layer w30: v1@157,213 135,235 135,1718 260.98,1843.98 v1(260.98,1905.97)
  Bottom Layer w20: C25.1@193.52,1906.48 v1@260.46,1906.48 ; 1402,219 1403.5,220.5 1403.5,422.56 1439,458.06 R32.2
  Bottom Layer w30: R28.1 135.4,1985.6 U7.1 193,1984.65 C25.1 ; v1(157,211) 1739,211 1747.07,219.07 F1.2 ; R33.1@1649,278.5 F1.2 ; 1688,291.59 U9.1 ; C39.2 1776.51,371.42 1754,371.42 ; C29.1 1754,453.48 1754,371.42 ; F1.2 1747.07,282.44 1754,289.37 1754,371.42
5V_jc: C40.1 R33.2 R36.2 U4.13 | length 2359.4
  Top Layer w20: v1(1447,334) 1455,334 1475,354 1475,2318 v1(1455,2338)
  Bottom Layer w20: U4.13@1361.26,2336.74 v1@1455,2336.74 ; C40.1 R36.2 R33.2 1581,285.37 R33.2@1578.5,282.87
+5V: C1.1 C30.1 C31.1 C32.1 C38.1 U1.4 U9.8 | length 2564.3
  Bottom Layer w30: U1.4 255.45,677.6 242,664.15 242,608 ; C1.1 243.16,609.16 242,608 ; U9.8 1776.5,600.5 1782,606 C31.1 C30.1 1625.18,952 C38.1 1318.84,952 1150.84,1120 809,1120 643,954 643,578.57 625.43,561 259.57,561 242,578.57 242,608
+BS: C12.1 C33.2 D6.2 L3.2 Q2.5 Q2.6 Q2.7 Q2.8 R6.1 R34.2 U2.4 | length 2511.6
  Top Layer w30: v1@1553,806 1557,810 v1(1557,1096) ; v1@1704,1093 1852.43,1093 1928,1168.57 1928,2393 v1(1870,2451)
  Bottom Layer w30: R34.2 1439,753.35 ; C33.2 1439,753.35 ; D6.2 1444,1173.07 1444,1143.57 1461.57,1126 Q2.8@1544.3,1126 ; Q2.8@1544.3,1109.28 Q2.8@1544.3,1126 ; Q2.8 Q2.8@1544.3,1126 ; L3.2 1553.95,746.7 1547.29,753.35 1439,753.35 ; Q2.5 1691.91,1126 Q2.8@1544.3,1126 ; R6.1@1847,2390 1854.4,2397.4 U2.4@1854.4,2530.94
  other v1: 1556,703 1556,754.5 1556,806 1699,1102 1557,1137.5 1557,1179
BAT_VTG: C35.2 R35.2 R39.1 U4.4 | length 3378.7
  Top Layer w20: v1(1259,413) 1342,413 1397.72,468.72 1397.72,1351.72 1424,1378 1424,2788.86 v1(1424.15,2789)
  Bottom Layer w20: R35.2 497,405.5 553.5,462 553.5,471.5 556,471.5 563.5,464 R39.1 637.5,464 684.5,417 1255,417 v1(1259,413) ; U4.4 1363.01,2789 v1(1424.15,2789)
D+: P3.A6 P3.B6 U5.5 | length 3098.4
  Top Layer w12: v1(437.28,2345.28) 437.28,2275.28 403,2241 403,107 437.13,72.87 950.87,72.87 v1(955,77)
  Bottom Layer w12: v1(437.28,2345.28) 437.5,2345.5 488.5,2345.5 U5.5 ; v1(955,77) 955,72.13 958.85,68.28 P3.B6 958.85,-57.85 998.22,-57.85 P3.A6
D-: P3.A7 P3.B7 U5.6 | length 3077.2
  Top Layer w10: v1(404,2291) 389,2291 382,2284 382,100 431,51 1004,51 v1(1005,52)
  Bottom Layer w10: v1(404,2291) 485,2291 U5.6 ; P3.A7 978.54,40.54 992,54 v1@1011,54 ; P3.B7 1018,-7.55 1018,44
DS_CE: U4.31 U8.5 | length 1422.5
  Top Layer w20: v1(76,1864) 137,1925 137,2598 188,2649 620,2649 v1(683,2586)
  Bottom Layer w20: U4.31 v1@683,2586.97
DS_IO: U4.30 U8.6 | length 1354.9
  Top Layer w20: v1(125,1864) 174,1913 174,2567 220,2613 608,2613 v1(684,2537)
  Bottom Layer w20: U4.30 v1(684,2537)
DS_SCLK: U4.29 U8.7 | length 1277.1
  Top Layer w20: v1(173,1864) 181,1864 214,1897 214,2533 253,2572 600,2572 v1(685,2487)
  Bottom Layer w20: U4.29 v1@677,2486.97
DTR: U5.13 U6.2 U6.4 | length 682.6
  Bottom Layer w12: U5.13@239.38,2395 U5.13 286.62,2395 357,2465.38 357,2524 299.5,2581.5 299.5,2680.53 322,2703.03 322,2827.69 356.72,2862.41 U6.4 368.44,2864.28 391.28,2864.28 413.12,2886.12 435.55,2886.12 U6.2
DVD4V4: C2.1 C3.2 C4.2 C5.2 C6.2 C7.2 C8.2 D1.1 L1.2 R2.1 R26.2 U3.34 U3.35 | length 2911.6
  Top Layer w50: v1(303,891) v1(303,1581)
  Bottom Layer w20: R2.1 C8.2 119.54,859.54 169,909 386.5,909 471,824.5 C6.2 471,740.42 482.65,728.76 L1.2 ; D1.1 616.94,1802 639.28,1824.35 639.28,1825.28 651,1837 C4.2 813,1837 ; U3.35 U3.34 811.5,1835.5 813,1837 ; R26.2 1475.5,1891 1427.5,1939 1085,1939 1053.44,1907.44 1048.52,1907.44 1016,1874.92 C2.1 1016,1869.52 983.48,1837 813,1837
  Bottom Layer w50: v1(302,1539) 303,1540 303,1578.54 526.46,1802 D1.1
  other v1: 304,934
ESP_RXD: D4.1 R18.2 R23.2 | length 639.9
  Bottom Layer w20: R18.2 1679,2455.5 1681.5,2453 1714,2453 1738,2429 1738,2229 1764,2203 1764,2000 ; R23.2 1764,2000 ; D4.1 1764.07,1999.93 1764,2000
ESP_TXD: Q1.1 R19.2 | length 445
  Bottom Layer w20: Q1.1 1622,2133.75 1652.5,2164.25 1652.5,2354 1680,2381.5 R19.2
GDM_RXD: Q1.3 R26.1 U3.2 | length 725.5
  Bottom Layer w20: U3.2 1299.2,1563 1244,1563 1228,1579 1228,1623 1248,1643 1374,1643 1508,1777 1508,1856 1540.5,1888.5 1542,1888.5 Q1.3 1540,1925 1540,1955 R26.1 R26.1@1475.5,1955
GND: C1.2 C2.2 C3.1 C4.1 C5.1 C6.1 C7.1 C9.1 C10.1 C12.2 C13.1 C14.1 C17.2 C19.1 C20.1 C21.1 C23.1 C24.2 C25.2 C26.2 C27.2 C28.2 C29.2 C30.2 C31.2 C32.2 C33.1 C34.1 C35.1 C37.1 C38.2 C39.1 C40.2 CN1.0 CN1.C5 D1.2 D2.2 KEY1.3 KEY1.4 KEY1.5 KEY1.6 LED1.2 OLED1.1 P1.3 P3.0 P3.A1 P3.A12 P3.B1 P3.B12 P4.2 P4.3 P4.4 Q3.2 R4.2 R5.2 R8.2 R9.2 R17.1 R36.1 R39.2 R43.1 REST.2 RF1.2 RF1.3 RF1.4 TEMP1.2 TYP2.7 TYP2.8 TYP2.A12 TYP2.B12 U1.2 U2.2 U3.8 U3.13 U3.19 U3.21 U3.27 U3.30 U3.31 U3.33 U3.36 U3.37 U3.39 U4.1 U4.15 U4.38 U4.39 U5.1 U7.2 U8.4 U9.9 | length 20971.9
  Top Layer w10: v1(390,2476) 393.83,2479.83 393.83,2492.83 v1(442,2541)
  Top Layer w20: P1.3 66.53,2426.47 33.53,2426.47 20,2440 20,2833 TEMP1.2 ; v1@441,2542 v1(442,2541) ; OLED1.1 922,3292 1489.78,3292 1501.5,3280.28 v1(1501.5,3013.5) ; TYP2.A12 1651.74,107.58 1645.99,101.83 1603.09,101.83 TYP2.7 1589.93,68.99 1631.92,27 1901,27 1903,29 1903,33.48 1930.07,60.55 TYP2.8 1916.91,101.83 1874.02,101.83 1868.27,107.58 TYP2.B12 ; v1(1691,2274) 1845,2274 v1(1846,2273)
  Bottom Layer w10: 211,517 211,671.5 217,677.5 217,705 227.57,715.57 314,715.57 ; C26.2 324,2607.5 380,2551.5 380,2521.46 390,2511.46 v1(390,2476)
  Bottom Layer w20: TEMP1.2 126,2939 C20.1 ; U8.4 75,1702 127,1754 C27.2 297.5,1754 327.5,1784 406,1784 503.75,1881.75 503.75,1940.75 ; R5.2 119.54,517 ; C25.2 129,1910.5 126.5,1913 103.72,1913 86,1930.72 86,2011.28 97.72,2023 U7.2 350.5,2023 383.5,2056 C21.1 388.5,2056 503.75,1940.75 ; P4.4 119.54,385.66 119.54,517 ; KEY1.5 KEY1.6 501.41,1033.59 535,1000 C6.1 ; KEY1.5 272.49,1376 C23.1 362.5,1373.5 345.5,1373.5 334,1362 334,1342 ; R4.2 281.99,819.5 314,787.49 314,715.57 ; C1.2 345.99,611.66 314,643.65 314,715.57 ; KEY1.3 KEY1.4 335.81,1254.03 334,1255.84 334,1342 ; U1.2 314.57,715 314,715.57 ; P4.3 375.23,378 298,378 279.62,359.62 P4.2 1364.43,274.8 1375,285.37 R36.1 1375,359 ; RF1.4 RF1.4@436.26,1563.2 ; C35.1 489.72,476.28 489.72,505.28 478,517 ; U4.38 1021,2936.97 ; R39.2 637.5,400 678.5,359 1375,359 ; U3.30 U3.31 ; CN1.0@753.57,132.03 809,132.03 ; D2.2 778,625 753.57,600.57 CN1.0@753.57,511 ; U3.21 812.9,1018.8 812.9,1075.28 824.62,1087 909,1087 ; P3.0@818.3,-69 817.09,-67.79 817.09,123.93 809,132.03 ; OLED1.1 836,3388.57 850,3402.57 C19.1 ; U3.19 899,1018.3 899,1077 909,1087 ; U3.36 U3.37 943.2,1717.2 943.2,1661.8 961,1644 987.5,1644 ; C7.1 C3.1 624.72,1900 624.72,1924.14 D1.2 608.11,1940.75 503.75,1940.75 ; P3.A1@1116.42,4.62 P3.0@1158.45,-37.42 ; C13.1 C13.1@1169.5,848 ; CN1.0@1211,469.25 CN1.0@1214.43,472.68 ; CN1.0@1214.43,132.03 809,132.03 ; C2.2 1131,1870 1028,1767 U3.39 1029.8,1717.2 1029.8,1661.2 1030,1661 1030,1660 1014,1644 987.5,1644 ; U3.8 1161.1,1302.9 1115.6,1348.4 996,1348.4 ; U4.15 1062.03,2236.97 1024,2275 1024,2637 U4.39 1021,2646 1021,2936.97 ; U4.1 1021,2936.97 ; C33.1 1375,792.68 1222.5,640.18 1222.5,532.5 ; C34.1 1436.5,625.37 1436.5,608.22 1412.28,584 ; C37.1 1460,2760.5 1492,2728.51 1492,2658 1513,2637 1537,2637 REST.2 1540.5,2638 1611.5,2709 1611.5,2735 R9.2 ; v1@1500,3015 v1(1501.5,3013.5) 1503.5,3011.5 1621.5,3011.5 C17.2 1625,3008 1845,3008 C10.1 ; R17.1 1683.5,2309.5 1683.5,2284.21 1691,2276.71 v1(1691,2274) ; Q3.2 1779.5,1281 1779.5,1253.75 ; R43.1 1779.5,1226.5 1779.5,1253.75 ; v1(1846,2273) R8.2 ; TYP2.8 1930.07,355.93 1909.09,376.91 C39.1 1846,535 ; 119.54,517 211,517 478,517 ; 334,1342 337.5,1345.5 669.4,1345.5 U3.27 672.3,1348.4 726.4,1348.4 ; RF1.4@436.26,1563.2 436.42,1563.35 436.42,1579.95 RF1.3 488.84,1608.2 668.7,1608.2 U3.33 730.28,1606.4 742,1594.68 742,1531.52 ; RF1.4@436.28,1563.2 436.44,1563.04 436.44,1546.03 RF1.2 489.04,1518 668.7,1518 U3.31 ; 478,517 747.57,517 CN1.0@753.57,511 ; U3.31 730.28,1519.8 742,1531.52 ; 726.4,1348.4 996,1348.4 ; 726.4,1348.4 742,1364 742,1531.52 ; CN1.0@753.57,511 753.57,478.48 1060,478.48 ; 909,1087 1140,1087 1157.5,1069.5 U3.13 1157.5,860 C13.1@1169.5,848 ; 987.5,1644 996,1635.5 996,1348.4 ; 1060,478.48 CN1.0@1214.43,478.48 ; 1060,478.48 1058.94,479.54 CN1.C5 1066.66,647.69 1066.66,688.66 1100,722 1100,783.5 C14.1 1102,784 1133,815 1160.28,815 1167,821.72 1167,845.5 C13.1@1169.5,848 ; CN1.0@1214.43,478.48 1275.94,478.48 1375,379.41 C40.2 1375,359 ; CN1.0@1214.43,478.48 1222.5,486.55 1222.5,532.5 ; 1222.5,532.5 1234.22,544.22 C28.2 1375,546.72 1412.28,584 ; 1412.28,584 1469.28,584 1481,572.28 1481,548 1503.79,525.21 1573.79,525.21 U9.9 1652.21,525.21 1836.21,525.21 1846,535 ; 1779.5,1253.75 1765.75,1253.75 1734,1222 1734,1111.47 1745.5,1099.97 C38.2 1818,952 1846,924 C30.2 C31.2 C32.2 1846,535
  Bottom Layer w31.5: P3.A12 848.84,-7.64 818.3,-38.18 818.3,-49.67 818.3,-69 818.3,-214.24 1158.45,-214.24 1158.45,-49.67 P3.0@1158.45,-38.18 ; P3.0@1151.18,-30.91 P3.0@1158.45,-38.18 ; P3.0@1158.45,-37.42 P3.0@1158.45,-38.18
  Bottom Layer w50: v1@1500,3015 C24.2
  other v1: 1497,2670 1576,2673.5
GSM_power: R4.1 U1.1 U4.26 | length 2012.9
  Top Layer w20: v1(351,853) 351,2302.84 424.44,2376.28 640.58,2376.28 v1(680.92,2335.94)
  Bottom Layer w20: v1(351,853) 351,850.29 348.49,847.79 348.49,824.5 R4.1 345.99,770.6 364.19,752.4 U1.1 ; U4.26@613.46,2336.45 v1@680.41,2336.45
GSM_TXD: D4.2 U3.1 | length 707.1
  Bottom Layer w20: U3.1 1378,1606 1524.56,1752.56 1819.56,1752.56 1850.63,1783.63 D4.2
IO0: U4.25 U6.3 | length 926.8
  Top Layer w15: v1(488,2860) 665,2860 742,2783 742,2347.02 v1(680.92,2285.94)
  Bottom Layer w15: U6.3 437.8,2862.03 485.97,2862.03 v1(488,2860)
  Bottom Layer w20: U4.25@613.46,2286.45 v1@680.41,2286.45
IO23: R20.1 U4.37 | length 895.5
  Bottom Layer w20: R20.1 148,3432.96 148,3102.72 197.72,3053 411,3053 411,3048.92 565.24,2894.69 605.23,2894.69 U4.37
IO25: P1.1 R13.1 U4.23 | length 744.8
  Bottom Layer w20: R13.1 167.5,2203.5 89.5,2203.5 P1.1 74,2144.72 89.72,2129 525.26,2129 U4.23@587.26,2191 ; U4.23@591.29,2186.97 U4.23
IO33: P1.2 R21.1 U4.24 | length 873.2
  Bottom Layer w20: P1.2 157.28,2319 169,2330.72 R21.1 ; 165.73,2319.73 201,2284.46 201,2185.46 230.46,2156 512.95,2156 545,2188.05 545,2229.82 552.15,2236.97 U4.24
Ip5306_IRQ: U4.5 U9.4 | length 2477.5
  Top Layer w20: v1@1462,2622 1501,2583 1501,2302.77 1501,386 v1(1510,377)
  Bottom Layer w20: U4.5 1368.69,2729.25 1424.75,2729.25 1457,2697 v1@1457,2629 ; v1(1510,377) 1511.91,375.09 1537.45,375.09 1538,374.54 U9.4
  other v1: 1462,2631
KEY1: C23.2 KEY1.2 R25.1 U4.9 | length 2349.1
  Top Layer w20: v1(497,1312) 497,2174 572,2249 1196,2249 1233,2286 v1(1233,2501)
  Bottom Layer w20: KEY1.2@361.78,1176.66 KEY1.2 435.94,1175.32 443,1182.37 R25.1 ; C23.2 366,1311 442,1311 R25.1 ; v1(497,1312) 445,1312 R25.1 ; v1@1233,2499 1270.97,2536.97 U4.9
KEY2: D8.1 D9.1 KEY1.1 | length 1973.6
  Bottom Layer w20: KEY1.1 363.12,1106.72 374.84,1095 713.3,1095 780.3,1162 1174,1162 1238.5,1097.5 1369.5,1097.5 1385,1113 1385,1200 1408,1223 1656.87,1223 1756.87,1323 1871,1323 1884,1336 D9.1@1884,1437 ; D9.1 D8.1
KEY2IN: D8.2 R29.1 U4.10 | length 1360.1
  Top Layer w20: v1(1540,1560) v1(1540,2480)
  Bottom Layer w20: U4.10 1530.33,2486.97 1537.29,2480 v1(1540,2480) ; R29.1 1539.5,1519.5 1539.5,1540.78 1576.22,1577.5 1721.54,1577.5 D8.2
NET: R10.1 U3.41 | length 453.7
  Bottom Layer w20: U3.41 1114.6,1796.3 1454.3,1796.3 R10.1 1476,1820.5 R10.1@1473.5,1823
NetC8_1: C8.1 R2.2 R5.1 U1.5 | length 285.7
  Bottom Layer w20: R5.1 183.54,749 ; C8.1 183.54,749 ; U1.5 186.94,752.4 183.54,749
NetC11_1: C11.1 R7.2 R9.1 U2.5 | length 364.7
  Bottom Layer w20: 1677,2713 R7.2 ; 1678.94,2714.94 1678.94,2646.56 1681,2644.5 C11.1 1681,2600.36 1692.36,2589 1724.77,2589 1779.6,2534.17 U2.5@1779.6,2530.94
NetC27_1: C27.1 D7.1 U8.8 | length 162.2
  Bottom Layer w20: U8.8 225.7,1817.3 294.3,1817.3 C27.1 364,1818 D7.1
NetC28_1: C28.1 R32.1 | length 110.2
  Bottom Layer w20: R32.1 1377.5,463.06 1377.5,480.22 1439,541.72 C28.1
NetC34_2: C34.2 R34.1 U9.6 | length 342
  Bottom Layer w20: C34.2 1375,658 ; R34.1 1375,658 ; U9.6 1587.45,601.05 1587.45,636.55 1575,649 1484,649 1474.13,658.87 1375.87,658.87 1375,658
NetD3_2: D3.2 R20.2 | length 160.2
  Bottom Layer w20: D3.2@59.62,3589.06 59.62,3465.88 84,3441.5 R20.2@84,3439
NetD6_1: D6.1 F2.1 Q2.1 Q2.3 R30.1 R35.1 | length 2330.6
  Top Layer w20: v1(1295,323) 1352,323 1431.5,402.5 1441,412 v1(1441,1259)
  Bottom Layer w20: R35.1 561,358 578.44,340.56 579.31,340.56 592.93,326.94 F2.1 1292,323 v1@1300,331 ; v1(1441,1259) 1443.5,1261.5 1443.5,1307.43 D6.1 1552.97,1307.93 1574.9,1286 1632,1286 1644.3,1298.3 Q2.3 1644.3,1484.8 1674,1514.5 R30.1
NetD9_2: D9.2 Q3.3 R30.2 R37.2 R38.2 | length 636.5
  Bottom Layer w20: R37.2 1474,1448.5 1507,1481.5 1610,1481.5 ; 1607.5,1466.5 1607.5,1448.5 R38.2 1610,1481.5 ; Q3.3 1813.5,1421.5 1796.43,1438.57 D9.2 1738.64,1447 1710.29,1447 1707,1450.29 1707,1534.13 1693.13,1548 1613,1548 1612.5,1547.5 1612.5,1519.5 R30.2 1610,1481.5
NetF2_2: F2.2 P4.1 | length 534.9
  Bottom Layer w30: P4.1 230.41,440.41 256,466 437,466 459.07,443.93 F2.2
NetL1_1: L1.1 U1.3 | length 169.6
  Bottom Layer w20: U1.3 456.4,677.6 492,642 492,621.65 L1.1
NetL2_1: L2.1 U2.3 | length 74.2
  Bottom Layer w39.37: L2.1@1852.43,2720.95 1853.92,2720.95 1855.89,2718.98 U2.3
NetL3_1: L3.1 U9.7 | length 168.1
  Bottom Layer w20: U9.7 1638,726 1640,728 1660.4,728 1672.05,739.65 L3.1
NetLED1_1: LED1.1 R10.2 | length 83.1
  Bottom Layer w20: R10.2@1540,1816.5 R10.2 ; R10.2@1542.5,1814 R10.2@1542.5,1816 ; R10.2@1543,1816 1545,1818 LED1.1
NetQ1_2: Q1.2 R27.1 | length 73
  Bottom Layer w20: Q1.2 1625.5,1891.5 R27.1@1685,1891.5 ; R27.1@1687.5,1894 R27.1@1685,1891.5 ; R27.1 1686.5,1891.5 R27.1@1685,1891.5
NetQ2_2: Q2.2 R37.1 | length 131
  Bottom Layer w20: R37.1 1540.5,1443.5 1540.5,1417.72 1594.3,1363.92 Q2.2 Q2.2@1595.22,1340.53
NetQ2_4: Q2.4 R38.1 | length 114.8
  Bottom Layer w20: R38.1 1674,1385.52 1694.3,1365.22 Q2.4
NetQ3_1: Q3.1 R31.1 R43.2 | length 133.3
  Bottom Layer w20: R31.1 1848.5,1155.5 1848.5,1281 Q3.1
NetR6_2: R6.2 R8.1 U2.1 | length 373.2
  Bottom Layer w20: U2.1@1779.6,2649.05 1779.6,2604.4 1815,2569 1815,2415 R6.2@1785.25,2385.25 ; R6.2@1780.5,2395 1783,2392.5 1783,2390 1783.5,2389.5 R6.2@1783.5,2387 ; R6.2@1783,2387.5 R6.2@1783.5,2387 ; R8.1@1784,2320 1783.5,2320.5 1783.5,2353.75 R6.2@1783.5,2383.5 ; R6.2@1785.5,2385 R6.2@1785.25,2385.25 ; R6.2@1783.5,2383.5 R6.2@1785.25,2385.25 ; R6.2@1783.5,2383.5 R6.2@1783.5,2387 ; R6.2@1783.5,2387 R6.2@1785.25,2385.25
NetR17_2: R17.2 U4.14 | length 376.7
  Bottom Layer w20: 1469,2289 1467.98,2287.98 1361.99,2287.98 U4.14 1594.47,2286.97 1617,2309.5 R17.2
NetR18_1: R18.1 U4.11 | length 372.6
  Bottom Layer w20: 1469,2436 1468.52,2436.48 1361.46,2436.48 U4.11 1596.47,2436.97 1615,2455.5 R18.1
NetR19_1: R19.1 U4.12 | length 256.5
  Bottom Layer w20: U4.12 1613.5,2386.97 1616,2384.47 R19.1
NetR22_2: R22.2 U5.2 | length 314.8
  Bottom Layer w20: R22.2 370,2682 401,2651 401,2531 437,2495 U5.2@497,2495
NetR24_2: R24.2 U5.3 | length 464.7
  Bottom Layer w20: R24.2 400.5,2768.5 400.5,2705.37 454.87,2651 455.13,2651 464.5,2641.63 464.5,2641.37 552,2553.87 552,2476.38 520.62,2445 U5.3@497,2445
NetR28_2: R28.2 U7.3 | length 65
  Bottom Layer w20: R28.2 134.5,2053 141.9,2060.4 U7.3
NetRF1_1: RF1.1 U3.32 | length 145.4
  Bottom Layer w20: RF1.1 525.23,1563.15 670.45,1563.15 U3.32
NetU8_2: U8.2 Y1.1 | length 122.6
  Bottom Layer w20: U8.2@175,1609.5 175,1542.79 192.21,1525.58 195.83,1525.57 206.5,1514.91 Y1.1
NetU8_3: U8.3 Y1.2 | length 115.2
  Bottom Layer w20: Y1.2 106.1,1514.91 125,1533.8 U8.3@125,1609.5
OLED_SCL: OLED1.3 R16.1 TEMP1.3 U4.36 U9.2 | length 6244.3
  Top Layer w20: TEMP1.3@74,2776 TEMP1.3 ; v1(280,2953) 280,3578 311.28,3609.28 1017.72,3609.28 1042,3585 1042,3384 OLED1.3 1086,3328 1563,3328 1613,3278 1613,426 1532,345 v1(1532,249)
  Bottom Layer w20: TEMP1.3@61,2785 62,2784 154,2784 R16.1@155,2783 ; R16.1 167.5,2783 199.5,2815 259,2815 275,2831 275,2940 287,2952 459.13,2952 574.16,2836.97 U4.36 ; v1(1532,249) 1604,249 1615,260 1615,312 1638,335 U9.2
OLED_SDA: OLED1.4 R15.1 TEMP1.4 U4.33 U9.3 | length 6309.6
  Top Layer w20: v1(146,2690) 147,2689 230,2689 ; v1@537,2689 230,2689 ; v1(1584,338) 1584,346 1643,405 1643,3288 1553,3378 OLED1.4 1136,3614 1114.72,3635.28 270.28,3635.28 234,3599 234,2693 230,2689
  Bottom Layer w20: TEMP1.4 188,2687 ccw(c188,2731) 188.29,2687 ccw(c188,2731) 197.3,2687.99 ccw(c188,2731) 227.39,2711.39 ccw(c188,2731) 232,2731 R15.1@232,2780.5 ; v1@537,2689 538.02,2687.98 611.93,2687.98 U4.33 ; v1(1584,338) v1@1584,339.54 ; U9.3@1588,356.46 U9.3
  other v1: 527,2684
RST/EN: C37.2 R42.2 REST.1 U4.3 U6.6 | length 1405.3
  Top Layer w20: v1(316,2914) 1217,2914 v1(1293,2838)
  Bottom Layer w20: v1(316,2914) 316.21,2913.79 366.36,2913.79 U6.6 ; v1(1293,2838) 1293.52,2837.48 1360.46,2837.48 U4.3 1442.54,2836.97 1455,2824.5 C37.2 1460,2822 1489.05,2822 1535,2776.06 1535,2768.5 1537.5,2766 R42.2 1539,2765 1539,2703 REST.1
RTS: U5.14 U6.1 U6.5 | length 640
  Bottom Layer w12: U5.14@263,2445 U5.14 239.38,2445 204,2480.38 204,2626 302,2724 302,2840.4 347.72,2886.12 364.69,2886.12 U6.5 368.44,2889.87 385.41,2889.87 407.25,2911.71 435.55,2911.71 U6.1
S_C: CN1.C3 D2.1 R14.2 | length 300.9
  Bottom Layer w10: D2.1 803.59,772.73 834.32,742 907.22,742 908.94,740.28 ; CN1.C3 908.94,740.28 ; R14.2@953,782 953,784.5 R14.2@955.5,782 ; R14.2 952,785.84 944.5,778.34 944.5,775.84 908.94,740.28
S_D: CN1.C7 D2.6 R11.1 | length 582.3
  Top Layer w10: v1(860,704) 861.5,705.5 1025.5,705.5 v1(1027,707)
  Bottom Layer w10: D2.6 803.59,843.59 813.43,843.59 831.68,825.34 1010.66,825.34 1027,809 R11.1 v1(1027,707) ; CN1.C7 858.94,702.94 v1(860,704)
S_R: CN1.C2 D2.5 R12.2 | length 431.6
  Bottom Layer w10: D2.5 780.87,850.56 780.87,835.01 796.88,819 811.86,819 843.86,787 876,787 882,781 R12.2@879.5,781 ; R12.2 912,785.84 923.47,797.31 923.47,797.87 934.94,809.34 974.06,809.34 996.22,787.17 996.22,652.69 CN1.C2
SIM_CLK: R14.1 U3.16 | length 197.4
  Bottom Layer w10: R14.1 954.5,860.5 1027.6,933.6 U3.16
SIM_DATA: C14.2 R11.2 U3.15 | length 254.5
  Bottom Layer w10: R11.2 1027.92,848.92 1098.58,848.92 C14.2 1100,848.5 1100,898 1070.9,927.1 U3.15
SIM_RST: R12.1 U3.17 | length 220.6
  Bottom Layer w10: R12.1 900.84,849.84 984.3,933.3 U3.17
SIM_VDD: C13.2 CN1.C1 D2.4 U3.18 | length 908.1
  Top Layer w10: v1(935,940) 1074,940 1137,877 1137,716 v1@1131,710
  Bottom Layer w10: D2.4 752.41,923.41 769,940 v1(935,940) 941,946 U3.18 ; CN1.C1 1108.94,684.94 v1(1131,707) 1131,710 1169.5,748.5 1169.5,784 C13.2
SW_POWER: R31.2 U4.8 | length 1864.7
  Top Layer w20: v1(1674,2558) 1719.16,2558 1877,2400.16 1877,1263 v1(1765,1151)
  Bottom Layer w20: U4.8 1432.03,2586.97 1458,2561 1651,2561
U0RXD: R22.1 U4.34 | length 178.9
  Bottom Layer w20: R22.1@434,2736.97 U4.34
U0TXD: R24.1 U4.35 | length 181.1
  Bottom Layer w20: R24.1@435,2794.69 605.23,2794.69 U4.35
VBAT: D7.2 U8.1 | length 221.9
  Bottom Layer w20: U8.1 225,1624.7 227.22,1626.91 267.4,1626.91 D7.2
VBUS: F1.1 P3.A4 P3.A9 P3.B4 P3.B9 TYP2.A9 TYP2.B9 | length 1633.6
  Top Layer w20: TYP2.A9 1705.82,118.37 1705.82,70.18 1718,58 1799,58 1816,75 1816,120.19 TYP2.B9 1820.57,124.76 1820.57,188.57 v1(1822,190)
  Bottom Layer w10: P3.B4 P3.B4@900.7,-8.55
  Bottom Layer w20: 892.56,-34.56 892.56,-44.99 931.28,-83.72 1041.28,-83.72 1081,-44 1081,30 1095,44 ; F1.1@1867.31,260.94 1880.93,274.56 F1.1
  Bottom Layer w30: 1095,44 1506,44 1529,21 1781,21 1821,61 1821,245 1836.94,260.94 F1.1@1867.31,260.94
VCC3V3: C9.2 C10.2 C11.2 C17.1 C19.2 C20.2 C24.1 D3.1 L2.2 OLED1.2 P1.4 R7.1 R13.2 R15.2 R16.2 R21.2 R23.1 R25.2 R27.2 R29.2 R42.1 TEMP1.1 U4.2 | length 9692.7
  Bottom Layer w20: 21,2274 30,2265 R13.2 ; 52,1441 420,1441 443,1418 R25.2 ; C24.1 1504.92,2915 1540,2879.92 R42.1 ; R7.1 1630,2833 1643.5,2819.5 1643.5,2653.72 1636.78,2647 1619.5,2647 1617,2644.5 C11.2 ; R27.2 1720,1927 ; R23.1@1772,1896 1751,1896 1720,1927 ; 1951,1935.57 1942.43,1927 1720,1927
  Bottom Layer w30: 52,1441 21,1472 21,2274 21,2540 ; TEMP1.1 72,2989 21,2989 ; TEMP1.1@74,2998 78,3002 201,3002 ; D3.1 173.74,3588.74 173.74,3632.74 175,3634 ; R21.2 24,2537 21,2540 ; R16.2@174,2847 R15.2@227,2847 ; 185,3009 cw(c185,2957) 237,2957 R15.2@237,2852 ; OLED1.2 936,3634 ; C24.1@1471.97,2886.97 C24.1 1527.52,2942.52 1592.44,2942.52 1594.92,2945 C17.1 ; R29.2 1469,1521 1469,1582 1495.5,1608.5 1873.5,1608.5 1951,1686 1951,1935.57 1951,2927.43 ; R7.1 1613,2934 C17.1 ; L2.2 1841.35,2839.05 1848,2845.71 C10.2@1848,2945 ; 21,2540 21,2989 ; 21,2989 21,3557.88 17,3561.88 17,3604.12 21,3608.12 21,3617 38,3634 118,3634 119,3633 120,3634 175,3634 ; 175,3634 936,3634 ; 936,3634 1928,3634 1951,3611 1951,2927.43 ; C17.1 1625.84,2946.84 1830,2946.84 1831.84,2945 C10.2@1848,2945 ; C10.2@1848,2945 1933.43,2945 1951,2927.43
  Bottom Layer w35: U4.2 C24.1@1471.97,2886.97
VCC_UART: C21.2 C26.1 U5.4 U5.16 U7.5 | length 955.9
  Top Layer w25: v1@315,1991 315,2503 v1(324,2512)
  Bottom Layer w25: C26.1 260,2545.69 260.69,2545 285.24,2545 317.29,2512.96 323.04,2512.96 v1(324,2512) ; U7.5 313.73,1987.27 328.77,1987.27 333.5,1992 C21.2 C21.2@388.5,1992 ; v1@331,2397 v1(333,2395) U5.4 497,2395 496.31,2394.31 U5.4@454.31,2394.31
  other v1: 316,1989
pads on no net: CN1.C6 D2.3 P3. P3.A5 P3.A8 P3.B5 P3.B8 TYP2.A5 TYP2.B5 U3.3 U3.4 U3.5 U3.6 U3.7 U3.9 U3.10 U3.11 U3.12 U3.14 U3.20 U3.22 U3.23 U3.24 U3.25 U3.26 U3.28 U3.29 U3.38 U3.40 U3.42 U4.6 U4.7 U4.16 U4.17 U4.18 U4.19 U4.20 U4.21 U4.22 U4.27 U4.28 U4.32 U5.7 U5.8 U5.9 U5.10 U5.11 U5.12 U5.15 U7.4 U9.5
copper on no net:
  other v2: 596.38,134.08 1381.38,134.08 404.62,3544.06 1584.62,3544.06

## Polygon pours and split planes (outlines as drawn)
GND on Top Layer "TOP" (solid, pour order 14): 47,3662 2,1422 1,1421 89,1421 90,1420 90,970 1,970 1,42 45,-2 46,-2 47,-1 592,-1 592,-230 634,-272 1347,-272 1384,-235 1384,-5 1386,-3 1933,-3 1973,37 1973,3618 1929,3662 1919,3662
GND on Bottom Layer "BOTTOM" (solid, pour order 16): 1,3614 1,1421 5,1417 88,1417 88,972 -1,972 -1,41 43,-3 590,-3 591,-4 591,-230 592,-230 635,-273 636,-272 1347,-272 1388,-231 1388,-6 1931,-6 1974,37 1974,3612 1975,3613 1925,3663 44,3663 35,3654

## Other copper
Top Layer:
  rectangle net +BS: 1526,666 1583,1197
  pour cut-out: 1721.51,843.46 1509.51,843.46 1509.51,649.39 1722.49,649.54
  pour cut-out: 400.24,772.83 594.24,772.83 594.24,561.83 399.24,561.83 398.24,560.83
  pour cut-out: -181.85,2314.86
  pour cut-out: 1906,2884 1714,2884 1714,2672 1904,2672
  pour cut-out: 3.11,3662.13 3.11,3043 1974.47,3043 1974.47,3648.34
Bottom Layer:
  rectangle net VCC3V3: 1455,2882 1767,2978
  rectangle net VCC3V3: 1741,2815 1958,2978
  rectangle net NetL3_1: 1627,670 1693,815
  rectangle net DVD4V4: 858,1802 1034,1849
  rectangle net DVD4V4: 586,1673 866,1849
  rectangle net DVD4V4: 165,874 506,950
  rectangle net DVD4V4: 430,709 506,921
  rectangle net +BS: 1415,1081 1718,1198
  rectangle net GND: 1102.5,-42 1126.17,17.95
  rectangle net GND: 850.33,-41 874,17.95
  rectangle net VBUS: 882.02,-46.17 905.69,17.95
  rectangle net VBUS: 1071,-46.13 1094.67,30
  pour cut-out: 1506.25,649.5 1506.25,843.5 1717.75,843.5 1717.75,649.5
  pour cut-out: 400.24,773.58 594.24,773.58 594.24,562.08 400.24,562.08
  pour cut-out: 1712,2883.75 1906,2883.75 1906,2672.25 1712,2672.25
  pour cut-out: 3.11,3662.06 3.11,3043 1974.47,3043 1974.47,3648.28

## Silkscreen, mask and mechanical layers (free items; w line width, h text height)
Top Overlay:
  circle w10: c1584.62,3544.06 r104.21
  circle w10: c404.62,3544.06 r104.21
  circle w10: c596.38,134.08 r104.21
  circle w10: c1381.38,134.08 r104.21
  lines w5: 28.7,3564.68 186.18,3564.68 186.18,3615.86 28.7,3615.86 28.7,3564.68 ; 316.5,2320.73 1674.77,2320.73 1674.77,3230.03 316.5,3230.03 316.5,2320.73 ; 416.5,2568.62 1574.77,2568.62 1574.77,3147.36 416.5,3147.36 416.5,2568.62
  lines w39.37: 1929.57,75.08 1929.57,99.08
  text "BWL-1.2V" at 756,2122 h60
Mechanical 1:
  lines w10: 0,971 0.41,970.59 91.46,970.59 91.46,1420.39 1.39,1420.39 1.39,3599.61 ; 1,119 1,50 ccw(c51,50) 51,0 171,0 ; 1,3549 1,3612 cw(c51,3612) 51,3662 147,3662 ; 1.06,50.06 1.06,970.59 ; 66.13,3662.13 1867.87,3662.13 ; 120.95,0.05 593.57,0.05 593.57,-230.57 ; 593,-221 ccw(c643,-221) 643,-271 ; 633.94,-270.94 1342.06,-270.94 ; 1335,-271 ccw(c1335,-221) 1385,-221 ; 1384.91,-228.09 1384.91,-3.92 1924.08,-3.92 ; 1760,3662 1925,3662 cw(c1925,3612) 1975,3612 1975,3495 ; 1800,3663 1924,3663 cw(c1924,3613) 1974,3613 1974,3486 ; 1924,-4 ccw(c1924,46) 1974,46 ; 1974.47,46.47 1974.47,3555.53

## Text inside footprints (layer, text, board x,y; h text height)
CN1: Bottom Overlay "LOCK" at 785.18,242.26 h19.68 r270; Bottom Overlay "OPEN" at 1168.17,242.25 h19.68 r270